# Altium PCB 0172 F.PcbDoc
Units mm, origin at the board's own origin, x right, y up, seen from the top; angles counter-clockwise.
Board outline 30 x 20 mm, 2 copper layers (Top Layer, Bottom Layer); 13 components, 8 nets, 149 pads, 0 vias.
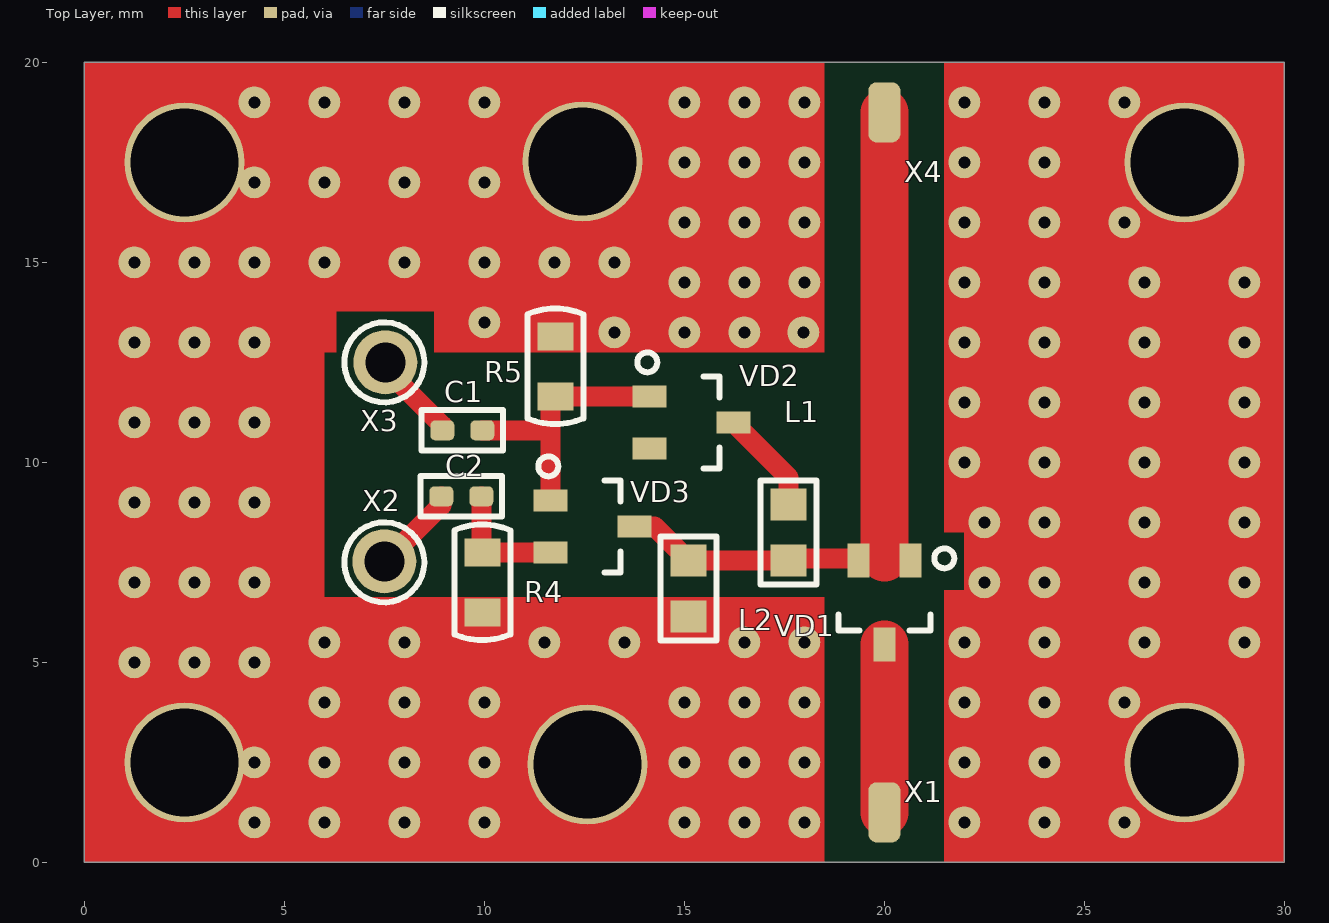
[diagram p0: Top Layer view]
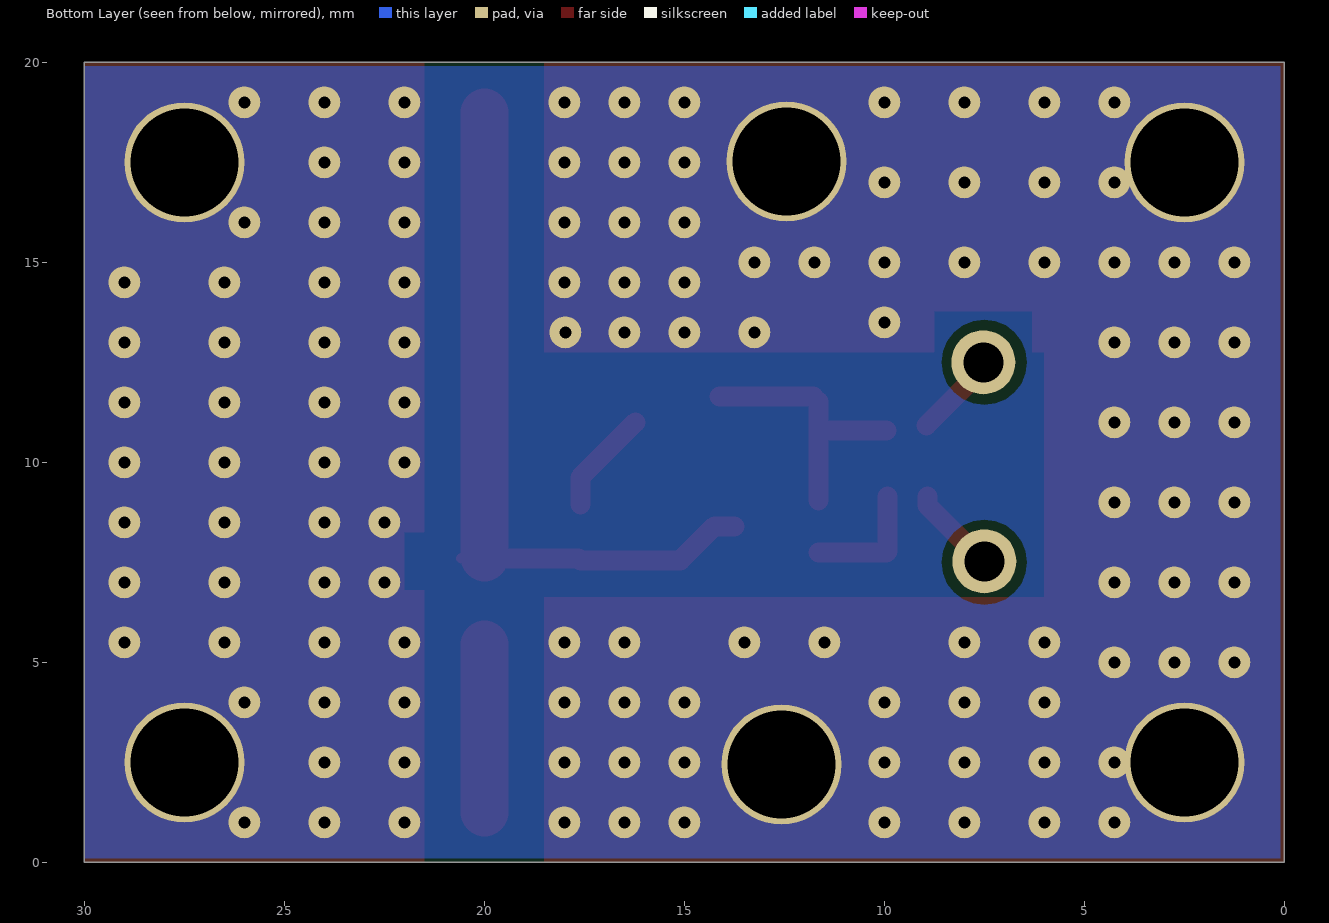
[diagram p1: Bottom Layer view, seen from below]

## Layer stack, top to bottom
Top Solder: solder mask 0.0102, Solder Resist, Dk 3.5
Top Layer: signal copper 0.0356
Dielectric 1: dielectric 0.32, FR-4, Dk 4.8
Bottom Layer: signal copper 0.0356
Bottom Solder: solder mask 0.0102, Solder Resist, Dk 3.5

## Board outline
0,0 0,20 30,20 30,0

## Design rules (kind name [scope] priority, off if disabled: settings)
AssemblyTestPointUsage AssemblyTestPointUsage_1 [All] p2:
AssemblyTestpoint AssemblyTestpoint_1 [All] p2: testpointundercomponent=TRUE minsize=1.016 maxsize=2.54 preferedsize=1.524 minholesize=0 maxholesize=1.016 preferedholesize=0.813 testpointgrid=0.025 usegrid=TRUE gridtolerance=0 allowsidetop=TRUE allowsidebottom=TRUE
Clearance [All] p1: gap=0.254 ignorepadtopadclearanceinfootprint=FALSE except(0: Arc-Hole Track-Hole SMDPad-Hole THPad-Hole Via-Hole Fill-Hole Poly-Hole Region-Hole Text-Hole; 0.014: Arc-SMDPad Track-SMDPad)
Clearance Clearance_1 [All] p2: gap=0.254 ignorepadtopadclearanceinfootprint=FALSE except(0: Arc-Hole Track-Hole SMDPad-Hole THPad-Hole Via-Hole Fill-Hole Poly-Hole Region-Hole Text-Hole; 0.1: SMDPad-Poly SMDPad-Region THPad-Poly THPad-Region; 0.15: Track-Track Track-SMDPad SMDPad-SMDPad SMDPad-THPad SMDPad-Via THPad-THPad)
ComponentClearance ComponentClearance_1 [All] p2: gap=0.254 collisioncheckmode=3 verticalgap=0.254 showdistances=FALSE
DiffPairsRouting DiffPairsRouting_1 [All] p2: maxlimit=0.254 minlimit=0.254 mostfreqgap=0.254 toplayer_minwidth=0.381 toplayer_maxwidth=0.381 toplayer_prefwidth=0.381 bottomlayer_minwidth=0.381 bottomlayer_maxwidth=0.381 bottomlayer_prefwidth=0.381 maxuncoupledlength=12.7
FabricationTestPointUsage FabricationTestPointUsage_1 [All] p2: valid=0 allowmultiple=FALSE
FabricationTestpoint FabricationTestpoint_1 [All] p2: side=3 testpointundercomponent=TRUE minsize=1.016 maxsize=2.54 preferedsize=1.524 minholesize=0 maxholesize=1.016 preferedholesize=0.813 testpointgrid=0.025 allowsidetop=TRUE allowsidebottom=TRUE usegrid=TRUE gridtolerance=0
FanoutControl Fanout_LCC [IsLCC] p1: bgadir=Out bgaviamode=Centered fanoutstyle=Auto fanoutdirection=Alternating viagrid=0.025 // Fanout_LCC (Default Rule)
FanoutControl Fanout_BGA [IsBGA] p2: bgadir=Out bgaviamode=Centered fanoutstyle=Auto fanoutdirection=Alternating viagrid=0.025 // Fanout_BGA (Default Rule)
FanoutControl Fanout_Small [(CompPinCount < 5)] p3: bgadir=Out bgaviamode=Centered fanoutstyle=Auto fanoutdirection=OutThenIn viagrid=0.025 // Fanout_Small (Default Rule)
FanoutControl Fanout_SOIC [IsSOIC] p4: bgadir=Out bgaviamode=Centered fanoutstyle=Auto fanoutdirection=Alternating viagrid=0.025 // Fanout_SOIC (Default Rule)
FanoutControl Fanout_BGA_1 [IsBGA] p6: bgadir=Out bgaviamode=Centered fanoutstyle=Auto fanoutdirection=Alternating viagrid=0.025 // Fanout_BGA (Default Rule)
FanoutControl Fanout_LCC_1 [IsLCC] p7: bgadir=Out bgaviamode=Centered fanoutstyle=Auto fanoutdirection=Alternating viagrid=0.025 // Fanout_LCC (Default Rule)
FanoutControl Fanout_SOIC_1 [IsSOIC] p8: bgadir=Out bgaviamode=Centered fanoutstyle=Auto fanoutdirection=Alternating viagrid=0.025 // Fanout_SOIC (Default Rule)
FanoutControl Fanout_Small_1 [(CompPinCount < 5)] p9: bgadir=Out bgaviamode=Centered fanoutstyle=Auto fanoutdirection=OutThenIn viagrid=0.025 // Fanout_Small (Default Rule)
FanoutControl Fanout_Default_1 [All] p10: bgadir=Out bgaviamode=Centered fanoutstyle=Auto fanoutdirection=Alternating viagrid=0.025 // Fanout_Default (Default Rule)
Height Height_1 [All] p2: minheight=0 maxheight=25.4 prefheight=12.7
HoleSize HoleSize_1 [All] p2: absolutevalues=TRUE maxlimit=2.54 minlimit=0.025 maxpercent=80.000 minpercent=20.000
HoleToHoleClearance HoleToHoleClearance_1 [All] p2: gap=0.254 allowstackedmicrovias=TRUE
LayerPairs LayerPairs_1 [All] p2: enforce=TRUE
MinimumSolderMaskSliver MinimumSolderMaskSliver_1 [All] p2: minsoldermaskwidth=0.254
NetAntennae NetAntennae_1 [All] p2: netantennaetolerance=0
PasteMaskExpansion PasteMaskExpansion_1 [All] p2: expansion=0
PlaneClearance PlaneClearance_1 [All] p2: clearance=0.8
PlaneConnect PlaneConnect_1 [All] p2: planeconnectstyle=Direct reliefexpansion=0.508 reliefentries=4 reliefconductorwidth=0.254 reliefairgap=0.254
PolygonConnect [All] p1: connectstyle=Direct reliefconductorwidth=0.254 reliefentries=4 polygonreliefangle="90 Angle" airgapwidth=0.254
PolygonConnect PolygonConnect_1 [All] p2: connectstyle=Direct reliefconductorwidth=0.254 reliefentries=4 polygonreliefangle="90 Angle" airgapwidth=0.254
RoomDefinition Sheet1 [InComponentClass('Sheet1')] p1: confinementstyle=ConfineIn formatcopy=TRUE lockcomponents=FALSE outline 0.25,0 30,0 30,20 0.25,20
RoutingCorners RoutingCorners_1 [All] p2: cornerstyle=45-Degree minsetback=2.54 maxsetback=2.54
RoutingLayers RoutingLayers_1 [All] p2: top layer_v5=TRUE bottom layer_v5=TRUE
RoutingPriority RoutingPriority_1 [All] p2: routingpriority=0
RoutingTopology RoutingTopology_2 [All] p1: topology=Shortest
RoutingTopology [All] p2: topology=Shortest
RoutingTopology RoutingTopology_1 [All] p3: topology=Shortest
RoutingVias [All] p1: holewidth=0.711 width=1.27 viastyle="Through Hole" minholewidth=0.711 minwidth=1.27 maxholewidth=0.711 maxwidth=1.27
RoutingVias RoutingVias_1 [All] p2: holewidth=0.711 width=1.27 viastyle="Through Hole" minholewidth=0.711 minwidth=1.27 maxholewidth=0.711 maxwidth=1.27
ShortCircuit ShortCircuit_1 [All] p2: allowed=FALSE
SilkToBoardRegionClearance SilkToBoardRegionClearance_1 [All] p2:
SilkToSilkClearance SilkToSilkClearance_1 [All] p2: silktosilkclearance=0.254
SilkToSolderMaskClearance SilkToSolderMaskClearance_1 [IsPad] p2: minsilkscreentomaskgap=0.254 clearancetoexposedcopper=TRUE
SolderMaskExpansion [All] p1: expansion=0.102
SolderMaskExpansion SolderMaskExpansion_1 [All] p2: expansion=0.102
UnRoutedNet UnRoutedNet_1 [All] p2:
UnpouredPolygon UnpouredPolygon_1 [All] p2:
Width [All] p1: maxlimit=0.254 minlimit=0.254 preferedwidth=0.254
Width Width_08 [All] p2: maxlimit=0.8 minlimit=0.8 preferedwidth=0.8
Width Width_1 [All] p3: maxlimit=0.254 minlimit=0.254 preferedwidth=0.254 checkconnectedcopper=TRUE
25 further rules are at their usual default settings.

## Classes and differential pairs
component class Sheet1: C1 C2 L1 L2 R4 R5 VD1 VD2 VD3 X1 X4 С1

## Components (designator, comment, footprint, x,y, rotation, side; value= is the part's Value field where it differs from the comment)
C1 "0,1 мк" CAPC1005L 9.425,9.15 r0 top (schematic designator С1)
C2 "0,1 мк" CAPC1005L 9.45,10.8 r0 top
L1 "12" INDC1608L 17.6,8.25 r90 top
L2 "12" INDC1608L 15.1,6.85 r90 top
R4 "100" RESC1608L 9.95,7 r270 top
R5 "100" RESC1608L 11.775,12.4 r270 top
VD1 "HSMS-282B" SOT65P210X110-3N 20,6.5 r270 top
VD2 "HSMS-282B" SOT65P210X110-3N 15.175,11 r0 top
VD3 "HSMS-282B" SOT65P210X110-3N 12.7,8.4 r0 top
X1 "СРГ-50-884ФВ" TP0.8X1.5 20,1.25 r90 top
X2 "ИСПП-1а-250-3,0-1,5" TP1#1 7.5,7.5 r0 top
X3 "ИСПП-1а-250-3,0-1,5" TP1#2 7.5,12.5 r0 top
X4 "СРГ-50-884ФВ" TP0.8X1.5 20,18.75 r90 top

## Footprints (in the part's own frame and the unit in brackets; to place one, negate y for a bottom-side part, rotate by r counter-clockwise, add the part's x,y. Pads: shape width x height; smd on the part's side, far side on the other; paste and mask are expansions set on the pad)
CAPC1005L [mm] "Chip Capacitor, Body 1.0x0.5mm, IPC High Density"
  rrect50% 0.6x0.5 smd: 1(-0.5,0) 2(0.5,0)
  Top Layer pour cut-out: -0.2,0.5 -0.2,-0.5 0.2,-0.5 0.2,0.5
  silkscreen extent -1.02,-0.51 1.02,0.51, body extent -0.55,-0.3 0.55,0.3, height 0.6
INDC1608L [mm] "Chip Inductor, Body 1.6x0.8mm, IPC High Density"
  rect 0.8x0.9 smd: 1(-0.7,0) 2(0.7,0)
  Top Layer pour cut-out: -0.3,0.7 -0.3,-0.7 0.3,-0.7 0.3,0.7
  silkscreen extent -1.3,-0.7 1.3,0.7, body extent -0.87,-0.48 0.87,0.48, height 0.71
RESC1608L [mm] "Chip Resistor, Body 1.6x0.8mm, IPC High Density"
  rect 0.7x0.9 smd: 1(-0.75,0) 2(0.75,0)
  Top Layer pour cut-out: -0.4,0.7 -0.4,-0.7 0.4,-0.7 0.4,0.7
  silkscreen extent -1.45,-0.7 1.45,0.7, body extent -0.85,-0.48 0.85,0.48, height 0.6
SOT65P210X110-3N [mm] "SOT23, 3-Leads, Body 2,0x2,10mm, Pitch 0,65mm, IPC Medium Density"
  rect 0.85x0.55 smd: 1(-1.05,0.65) 2(-1.05,-0.65) 3(1.05,0)
  silkscreen extent -1.35,-1.15 0.7,1.75, body extent -1.1,-1.1 1.15,1.1, height 1.11
TP0.8X1.5 [mm]
  rrect50% 1.5x0.8 smd paste-25.4: 1(0,0)
TP1#1 [mm] "Test point 1x1.6"
  round 1.6 hole 1 paste+0: 1(0,0.025)
  silkscreen extent -1,-1 1,1
TP1#2 [mm] "Test point 1x1.6"
  round 1.6 hole 1 paste+0: 1(0.025,0)
  silkscreen extent -1,-1 1,1

## Part data
C1 C2: library part i6124B5A087044000001, "Чип-конденсатор", ManufacturerPartNumber="0402 X5R 0,1 мкФ ±10 % 10 В", Power/Voltage="10 В", Tolerance="±10 %", ImKey=i6124B5A087044000001, Name=0402, PCADLibrary=PASSIV.LIB, PCADPattern=C0402, PCADSymbol=C, PCADType=C0402, TKE/TKC={TKE/TKC}, Type=Конденсатор
L1 L2: library part i6124B5A087077000011, "Индуктивность без магнитопровода", ManufacturerPartNumber="0603CS-12NXJE (12 нГн ±5 %)", Tolerance="±5 %", ImKey=i6124B5A087077000011, Name=0603, PCADLibrary=PASSIV.LIB, PCADPattern=L0603M, PCADSymbol=INDUCT, PCADType=L-0603, Type=Индуктивность
R4 R5: library part i6124B5A08707A000021, "Чип-резистор", ManufacturerPartNumber="Р1-12-0,1-100 Ом ±5 % - Т", Power/Voltage="0,1 Вт", Tolerance="±5 %", ImKey=i6124B5A08707A000021, Name=0603, TU/GOST="АЛЯР.434110.005 ТУ", Type=Резистор
VD1 VD2 VD3: "RF Schottky Barrier Diodes", Manufacturer*="AVAGO Technologies", Package=SOT-323, ManufacturerPartNumber=HSMS-282B, Type=Микросхема
X1 X4: "Переход коаксиально-полосковый герметичный", ManufacturerPartNumber=СРГ-50-884ФВ, SymAuthor="Календарова В.", TU/GOST="ВРО.364.039 ТУ", Type=Переход
X2 X3: library part ИСПП, "Изолятор стеклянный пресованный проходной", ManufacturerPartNumber=ИСПП-1а-250-3,0-1,5, TU/GOST="СКНЦ.552327.191 ТУ", Type=Изолятор

## Free pads (board coordinates)
  round 3 hole 2.7: 0(2.5,17.5) 1(2.5,2.5) 2(12.575,2.45) 5(27.5,17.5) 6(12.45,17.525) 7(27.5,2.5)
  round 0.8 hole 0.3: 8(1.25,5) 8(1.25,7) 8(1.25,9) 8(1.25,11) 8(1.25,13) 8(1.25,15) 8(2.75,5) 8(2.75,7) 8(2.75,9) 8(2.75,11) 8(2.75,13) 8(2.75,15) 8(4.25,1) 8(4.25,2.5) 8(4.25,5) 8(4.25,7) 8(4.25,9) 8(4.25,11) 8(4.25,13) 8(4.25,15) 8(4.25,17) 8(4.25,19) 8(6,1) 8(6,2.5) 8(6,4) 8(6,5.5) 8(6,15) 8(6,17) 8(6,19) 8(8,1) 8(8,2.5) 8(8,4) 8(8,5.5) 8(8,15) 8(8,17) 8(8,19) 8(10,1) 8(10,2.5) 8(10,4) 8(10,13.5) 8(10,15) 8(10,17) 8(10,19) 8(11.5,5.5) 8(11.75,15) 8(13.25,13.25) 8(13.25,15) 8(13.5,5.5) 8(15,1) 8(15,2.5) 8(15,4) 8(15,13.25) 8(15,14.5) 8(15,16) 8(15,17.5) 8(15,19) 8(16.5,1) 8(16.5,2.5) 8(16.5,4) 8(16.5,5.5) 8(16.5,13.25) 8(16.5,14.5) 8(16.5,16) 8(16.5,17.5) 8(16.5,19) 8(17.975,13.25) 8(18,1) 8(18,2.5) 8(18,4) 8(18,5.5) 8(18,14.5) 8(18,16) 8(18,17.5) 8(18,19) 8(22,1) 8(22,2.5) 8(22,4) 8(22,5.5) 8(22,10) 8(22,11.5) 8(22,13) 8(22,14.5) 8(22,16) 8(22,17.5) 8(22,19) 8(22.5,7) 8(22.5,8.5) 8(24,1) 8(24,2.5) 8(24,4) 8(24,5.5) 8(24,7) 8(24,8.5) 8(24,10) 8(24,11.5) 8(24,13) 8(24,14.5) 8(24,16) 8(24,17.5) 8(24,19) 8(26,1) 8(26,4) 8(26,16) 8(26,19) 8(26.5,5.5) 8(26.5,7) 8(26.5,8.5) 8(26.5,10) 8(26.5,11.5) 8(26.5,13) 8(26.5,14.5) 8(29,5.5) 8(29,7) 8(29,8.5) 8(29,10) 8(29,11.5) 8(29,13) 8(29,14.5)

## Nets (pads, with @x,y where several pads share a name; then routed paths per layer and width w, separated by ;. In a path a pad name is that pad's centre, name@x,y a point inside that pad or via, vN(x,y) a via of type N, cw(c..) or ccw(c..) an arc to the next point about the centre after c; other vN are vias at no path point)
GND: L2.1 pad.0 pad.1 pad.2 pad.5 pad.6 pad.7 pad.8 R4.2 R5.1 | length 16.3
  Top Layer w0.254: pad.0@2.5,17.05 pad.0 ; pad.6@11.775,16.85 pad.6 pad.6@12.45,17.15 ; pad.2 pad.2@12.575,2.76
  Top Layer w0.5: R4.2 9.95,5.075 pad.2 15.1,4.975 L2.1 ; R5.1 11.775,14.275 12.5,15 pad.6@12.5,17.475
NetC2_1: C2.1 X3.1 | length 2.2
  Top Layer w0.254: C2.1 C2.1@8.95,10.919
  Top Layer w0.5: X3.1@7.5,12.369 C2.1@8.95,10.919
NetC2_2: C2.2 R5.2 VD2.1 VD3.1 | length 6.5
  Top Layer w0.5: C2.2 11.625,10.8 ; VD3.1 R5.2@11.65,11.525 ; R5.2 VD2.1
NetL1_1: L1.1 L2.2 VD1.1 VD1.2 VD3.3 X4.1 | length 18.4
  Top Layer w0.254: L1.1 L1.1@17.65,7.6 ; 20,7.62 19.98,7.6 VD1.1@20.575,7.6
  Top Layer w0.5: VD3.3 14.25,8.4 L2.2 L1.1 ; L1.1@17.65,7.6 19.98,7.6
  Top Layer w1.2: 20,7.62 X4.1
NetL1_2: L1.2 VD2.3 | length 2.6
  Top Layer w0.5: VD2.3 17.6,9.625 L1.2
NetR4_1: C1.2 R4.1 VD3.2 | length 3.1
  Top Layer w0.254: R4.1@9.925,7.775 R4.1
  Top Layer w0.5: R4.1@9.925,7.775 C1.2 ; R4.1 VD3.2
NetVD1_3: VD1.3 X1.1 | length 4.2
  Top Layer w1.2: X1.1 VD1.3
NetX2_1: C1.1 X2.1 | length 2.2
  Top Layer w0.5: X2.1@7.5,7.5 8.925,8.925 C1.1
pads on no net: VD2.2

## Polygon pours and split planes (outlines as drawn)
GND on Bottom Layer "Bottom Layer-No Net" (solid, pour order 6): 0.1,19.9 0.1,0.1 30,0.1 30,19.9

## Other copper
Top Layer:
  region net GND: 18.5,20 18.5,12.75 8.75,12.75 8.75,13.775 6.3,13.775 6.3,12.75 6,12.75 6,6.625 18.5,6.625 18.5,0 0,0 0,20
  region net GND: 21.5,20 21.5,8.25 22,8.25 22,6.8 21.5,6.8 21.5,0 30,0 30,20

## Silkscreen, mask and mechanical layers (free items; w line width, h text height)
Top Solder:
  rectangle: 2.25,12.75 6.3,14.225
  rectangle: 22,0 30,20
  rectangle: 2.5,13.775 18.5,20
  rectangle: 2.5,0 18.5,6.625
  rectangle: 21.5,0 27.5,6.8
  rectangle: 21.5,15 27.5,20
  rectangle: 0,0 6,20
  rectangle: 21.5,8.25 22,15
  rectangle: 8.75,12.75 18.5,16
Outline:
  the board outline again, w1.2
Mechanical 5:
  circle w0.254: c7.5,12.5 r1.25
  circle w0.254: c12.5,7.5 r1.25
  circle w0.254: c17.5,2.5 r1.25
  circle w0.254: c22.5,17.5 r1.25
  circle w0.254: c27.5,2.5 r1.25
  circle w0.254: c27.5,7.5 r1.25
  circle w0.254: c27.5,12.5 r1.25
  circle w0.254: c27.5,17.5 r1.25
  circle w0.254: c22.5,2.5 r1.25
  circle w0.254: c22.5,7.5 r1.25
  circle w0.254: c22.5,12.5 r1.25
  circle w0.254: c7.5,17.5 r1.25
  circle w0.254: c2.5,12.5 r1.25
  circle w0.254: c2.5,7.5 r1.25
  circle w0.254: c7.5,7.5 r1.25
  circle w0.254: c7.5,2.5 r1.25
  circle w0.254: c12.5,17.5 r1.25
  circle w0.254: c17.5,17.5 r1.25
  circle w0.254: c12.5,2.5 r1.25
  circle w0.254: c12.5,12.5 r1.25
  circle w0.254: c17.5,7.5 r1.25
  circle w0.254: c17.5,12.5 r1.25
  circle w0.254: c2.5,17.5 r1.25
  circle w0.254: c2.5,2.5 r1.25